# EAGLE board Battery Charging Circuit (EAGLE 9.6.2)
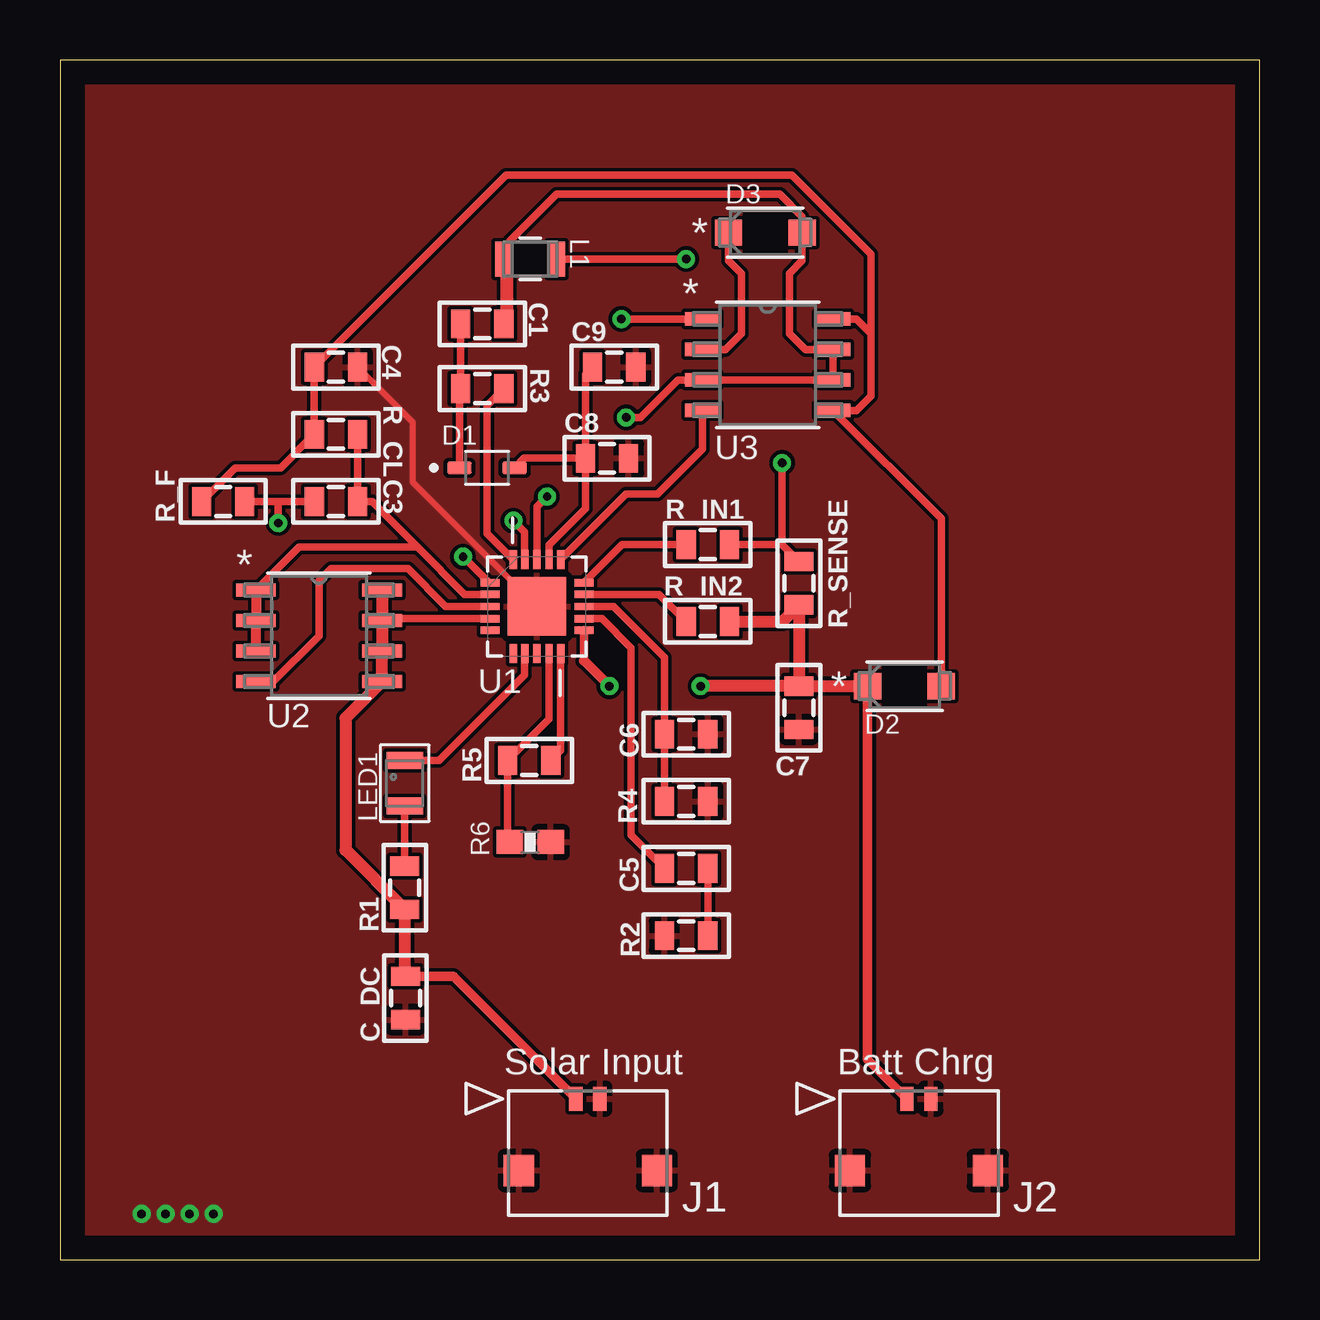
[diagram p0: board, top side]
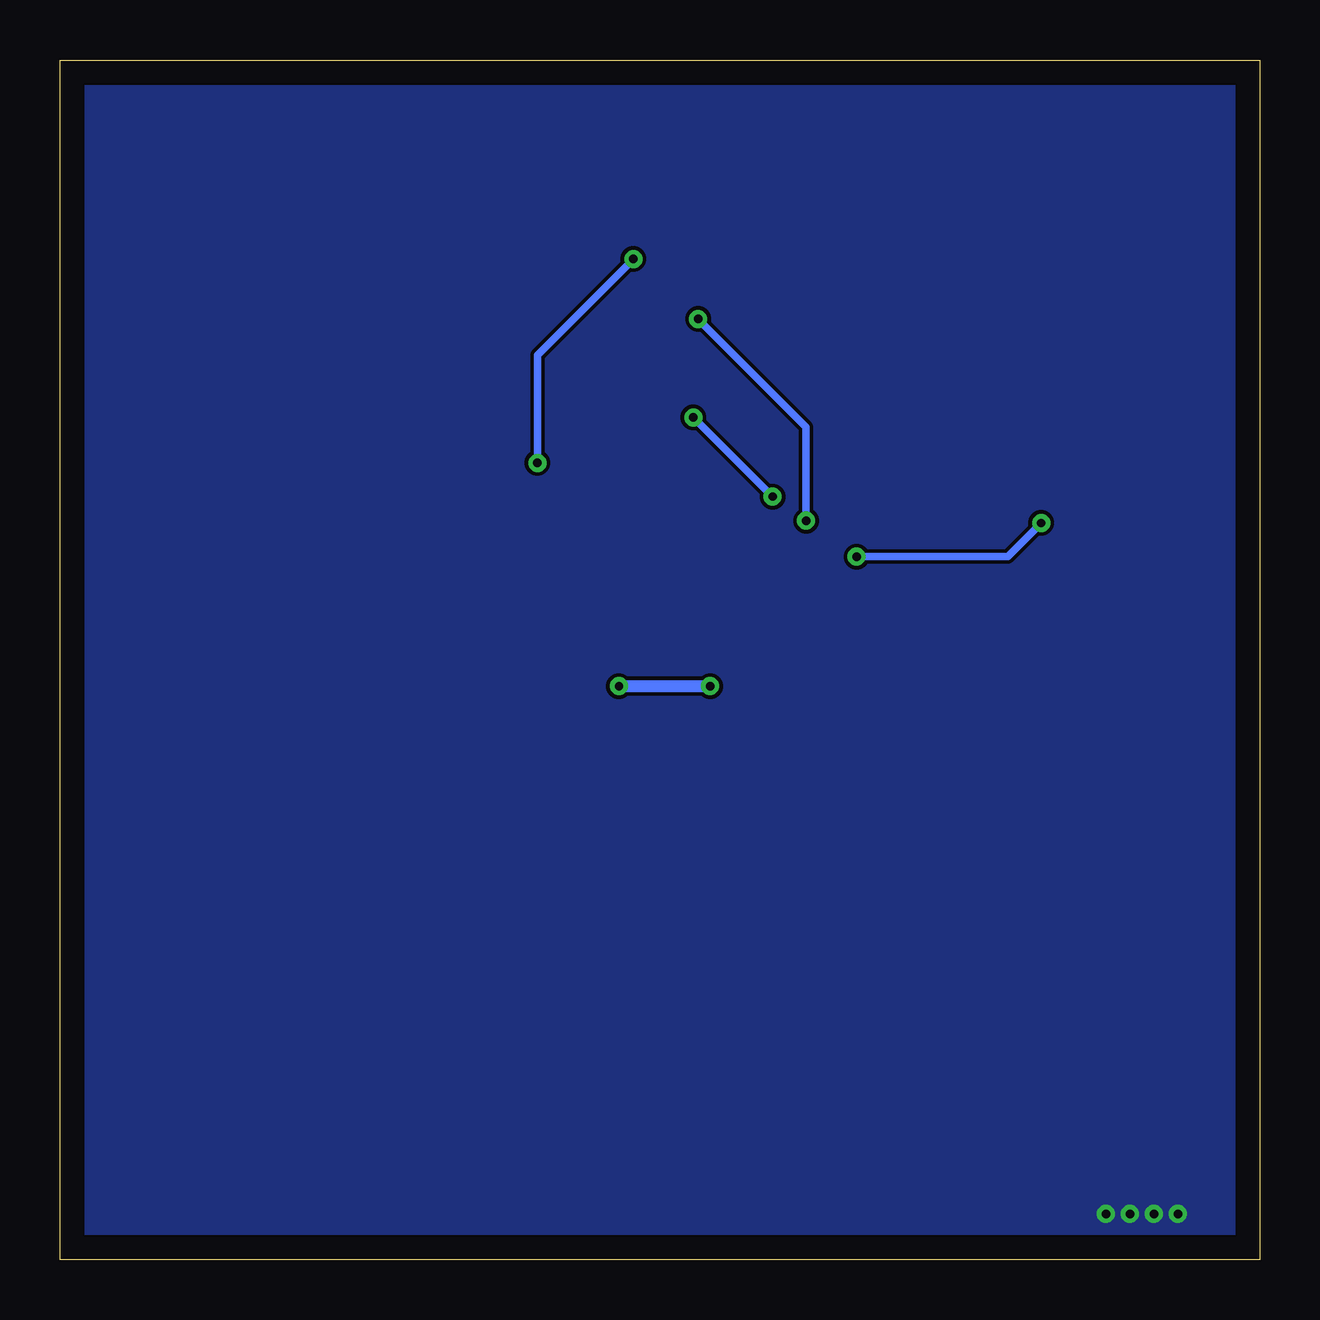
[diagram p1: board, bottom side, seen from below]

Size 50 x 50 mm. Coordinates in mm from the lower left corner, seen from the top.
Outline: 0,0 50,0 50,50 0,50 0,0
Copper layers (1*16): Top 0.035mm / dielectric 1.5mm / Bottom 0.035mm
Design rules "default": minimum track width 6mil, minimum drill 0.35mm, track to track 6mil, track to pad 6mil, pad to pad 6mil, via to via 6mil, smd to smd 6mil, copper to edge 40mil, drill to drill 6mil, minimum pad ring 10mil, minimum via ring 8mil, stop-mask expansion 4mil, vias tented up to drill 0mil, thermal gap 10mil

## Footprints (pad centres in the part's own frame; a part is rotated, then mirrored left to right if it is on the bottom)
0805 = smd 0.8 x 1.2: 1 -0.9,0; 2 0.9,0
SOD2512X110N = smd 1.03 x 0.52: A 1.15,0; C -1.15,0
CR_0LSFT1G_ONS = smd 1.143 x 1.092: 1 -1.537,0; 2 1.537,0
CON_5037630291 = smd 0.55 x 1: 1 0,0; 2 -1,0 | smd 1.26 x 1.3: 3 2.375,2.99; 4 -3.38,2.99
AIML-0805_ABR = smd 0.711 x 1.448: 1 -1.105,0; 2 1.105,0
LED_0805 = smd 0.711 x 1.524: 1 0,0; 2 1.905,0
0603-RES = smd 1.1 x 1: 1 -0.85,0; 2 0.85,0
QFN50P400X400X80-21N = smd 0.787 x 0.305: 1 -1.956,0.991; 2 -1.956,0.508; 3 -1.956,0; 4 -1.956,-0.508; 5 -1.956,-0.991; 11 1.956,-0.991; 12 1.956,-0.508; 13 1.956,0; 14 1.956,0.508; 15 1.956,0.991 | smd 0.305 x 0.787: 6 -0.991,-1.956; 7 -0.508,-1.956; 8 0,-1.956; 9 0.508,-1.956; 10 0.991,-1.956; 16 0.991,1.956; 17 0.508,1.956; 18 0,1.956; 19 -0.508,1.956; 20 -0.991,1.956 | smd 2.438 x 2.438: 21 0,0
SOIC-8_SI = smd 1.651 x 0.559: 1 -2.629,1.905; 2 -2.629,0.635; 3 -2.629,-0.635; 4 -2.629,-1.905; 5 2.629,-1.905; 6 2.629,-0.635; 7 2.629,0.635; 8 2.629,1.905
SOIC8_NARROW_VIS = smd 1.46 x 0.559: 1 -2.724,1.905; 2 -2.724,0.635; 3 -2.724,-0.635; 4 -2.724,-1.905; 5 2.724,-1.905; 6 2.724,-0.635; 7 2.724,0.635; 8 2.724,1.905

## Placement (x,y rotation side)
C1  0.1 uF  [0805]  17.6,39 0 top
C3  0.1 uF  [0805]  11.5,31.6 180 top
C4  10 uF  [0805]  11.5,37.2 0 top
C5  0.1 uF  [0805]  26.1,16.3 0 top
C6  4.7 uF  [0805]  26.1,21.9 0 top
C7  10 uF  [0805]  30.8,23 270 top
C8  1 uF  [0805]  22.8,33.4 0 top
C9  1 uF  [0805]  23.1,37.2 0 top
C_DC  0.1 uF  [0805]  14.4,10.9 270 top
D1  CMDSH-3TR  [SOD2512X110N]  17.8,33 0 top
D2  MBR230S1F  [CR_0LSFT1G_ONS]  35.2,23.9 0 top
D3  MBR230S1F  [CR_0LSFT1G_ONS]  29.4,42.8 0 top
J1  5037630291  [CON_5037630291]  21.5,6.7 180 top
J2  5037630291  [CON_5037630291]  35.3,6.7 180 top
L1  AIML-0805-150K-T  [AIML-0805_ABR]  19.6,41.7 180 top
LED1  LED_0805  [LED_0805]  14.37,18.9 90 top
R1  3 k  [0805]  14.37,15.5 270 top
R2  6.04 k  [0805]  26.1,13.5 0 top
R3  0  [0805]  17.6,36.3 180 top
R4  26.7 k  [0805]  26.1,19.1 180 top
R5  169 k  [0805]  19.56,20.8 180 top
R6  28.4k  [0603-RES]  19.6,17.4 180 top
R_CL  1  [0805]  11.5,34.4 180 top
R_F  5.1 k  [0805]  6.8,31.6 180 top
R_IN1  3.01 k  [0805]  27,29.8 0 top
R_IN2  3.01 k  [0805]  27,26.6 0 top
R_SENSE  1  [0805]  30.8,28.19 90 top
U1  LTC4012IUFPBF  [QFN50P400X400X80-21N]  19.88,27.22 0 top
U2  SI4431BDY-T1-E3  [SOIC-8_SI]  10.8,26 0 top
U3  AO4818B  [SOIC8_NARROW_VIS]  29.5,37.3 0 top

## Library data of the parts
C1 C3-C9 C_DC LED1 R1-R6 R_CL R_F R_IN1 R_IN2 R_SENSE = HSFL_Main_Library
D1 = charging; DESCRIPTION: Diode Schottky 30 V 100mA Surface Mount SOD-323; DIGI-KEY_PART_NUMBER: 1514-CMDSH-3TRPBFREECT-ND; MF: Central Semiconductor; MP: CMDSH-3 TR; PACKAGE: SOD-323 Central Semiconductor; PURCHASE-URL: https://pricing.snapeda.com/search/part/CMDSH-3 TR/?ref=eda
D2 D3 = charging; COPYRIGHT: Copyright (C) 2021 Ultra Librarian. All rights reserved.; DIGI-KEY_PART_NUMBER_1: MBR230LSFT1GOSTR-ND; DIGI-KEY_PART_NUMBER_2: MBR230LSFT1GOSCT-ND; DIGI-KEY_PART_NUMBER_3: MBR230LSFT1GOSDKR-ND; DIGI-KEY_PART_NUMBER_4: 2156-MBR230LSFT1G-OS-ND; MANUFACTURER_PART_NUMBER: MBR230LSFT1G; MFR_NAME: onsemi
J1 J2 = PDUv2; BUILT_BY: Molex_Team; COPYRIGHT: Copyright (C) 2018 Accelerated Designs. All rights reserved; MANUFACTURER_PART_NUMBER: 5037630291; SOURCELIBRARY: Add_to_database_2021-03-17; VENDOR: Molex Connector Corporation
L1 = charging; COPYRIGHT: Copyright (C) 2021 Ultra Librarian. All rights reserved.; DIGI-KEY_PART_NUMBER_1: 535-11623-1-ND; DIGI-KEY_PART_NUMBER_2: 535-11623-2-ND; DIGI-KEY_PART_NUMBER_3: 535-11623-6-ND; MANUFACTURER_PART_NUMBER: AIML-0805-150K-T; MFR_NAME: Abracon
U1 = charging; AVAILABILITY: In Stock; DESCRIPTION: Charger IC Multi-Chemistry 20-QFN (4x4); MF: Analog Devices; MP: LTC4012IUF#PBF; PACKAGE: QFN -20 Analog Devices; PRICE: None; PURCHASE-URL: https://pricing.snapeda.com/search/part/LTC4012IUF#PBF/?ref=eda
U2 = charging; COPYRIGHT: Copyright (C) 2021 Ultra Librarian. All rights reserved.; DIGI-KEY_PART_NUMBER_1: SI4431BDY-T1-E3CT-ND; DIGI-KEY_PART_NUMBER_2: SI4431BDY-T1-E3DKR-ND; DIGI-KEY_PART_NUMBER_3: SI4431BDY-T1-E3TR-ND; MANUFACTURER_PART_NUMBER: SI4431BDY-T1-E3; MFR_NAME: Vishay
U3 = charging; COPYRIGHT: Copyright (C) 2021 Ultra Librarian. All rights reserved.; DIGI-KEY_PART_NUMBER_1: SI4816BDY-T1-E3TR-ND; DIGI-KEY_PART_NUMBER_2: SI4816BDY-T1-E3CT-ND; DIGI-KEY_PART_NUMBER_3: SI4816BDY-T1-E3DKR-ND; MANUFACTURER_PART_NUMBER: SI4816BDY-T1-E3; MFR_NAME: Vishay

## Nets
BATT_CHRG: C7.1 D2.1 J2.1 R_IN2.2 R_SENSE.1 U1.11
BGATE: U1.16 U3.4
CHRG: LED1.2 U1.7
GND: C4.2 C6.2 C7.2 C8.2 C9.2 C_DC.2 J1.2 J1.3 J1.4 J2.2 J2.3 J2.4 R2.1 R4.1 R6.1 U1.21
ICL: U1.8
INFET: U1.3 U2.4
INH_SW1_NC: C_DC.1 J1.1 R1.2 U1.4 U2.5 U2.6 U2.7 U2.8
ITH: C5.1 U1.12
N$2: LED1.1 R1.1
N$6: C5.2 R2.2
N$7: R3.1 U1.20
N$8: C3.2 R_F.1 U1.1
N$9: C8.1 C9.1 D1.A U1.17
N$10: C1.1 D1.C R3.2
N$11: R_IN1.1 U1.15
N$12: R_IN2.1 U1.14
N$13: C6.1 R4.2 U1.13
N$15: R5.1 U1.10
N$16: R5.2 R6.2 U1.9
R_SENSE_R_IN1: L1.1 R_IN1.2 R_SENSE.2
S2: D3.1 U3.2
SHDN: U1.6
SW: C1.2 D3.2 L1.2 U1.18 U3.3 U3.6 U3.7
TGATE: U1.19 U3.1
U2_S: C3.1 R_CL.1 U1.2 U2.1 U2.2 U2.3
VBATT: C4.1 D2.2 R_CL.2 R_F.2 U3.5 U3.8

## Tracks (layer width: path | path; a pad name or v marks a point on that pad's centre or on a via)
BATT_CHRG  (via drill 0.35)
  Top 0.35: U1.11 21.84,24.96
  Top 0.4: D2.1 33.66,8.34 J2.1
  Top 0.406: 21.84,24.96 v22.9,23.9
  Top 0.508: R_IN2.2 30.11,26.6 R_SENSE.1 C7.1 | C7.1 D2.1 | C7.1 v26.7,23.9
  Bottom 0.508: v26.7,23.9 v22.9,23.9
BGATE
  Top 0.305: U1.16 23.59,31.9 24.9,31.9 26.78,33.78 U3.4
CHRG
  Top 0.305: U1.7 19.37,24.37 15.8,20.8 LED1.2
GND  (via drill 0.35)
  Top 0.254: U1.21 14.7,32.4 14.7,34.9 C4.2
  other vias: 3.4,1.9 4.4,1.9 5.4,1.9 6.4,1.9
  pour Top: -0.2,-0.2 -0.2,50.2 50.2,50.2 50.2,-0.2
  pour Bottom: -0.4,-0.4 -0.4,50.4 50.4,50.4 50.4,-0.4
INFET
  Top 0.305: U1.3 16.08,27.22 14.5,28.8 11.3,28.8 10.8,28.3 10.8,26 8.89,24.09 U2.4
INH_SW1_NC
  Top 0.305: U1.4 13.51,26.71 | 14.37,11.83 C_DC.1
  Top 0.4: C_DC.1 16.4,11.8 J1.1
  Top 0.508: U2.7 U2.6 U2.5 11.9,22.57 11.9,17.07 R1.2 14.37,11.83 | U2.8 U2.7 | 13.51,26.71 U2.7
ITH
  Top 0.305: U1.12 22.59,26.71 23.8,25.5 23.8,17.7 C5.1
N$2
  Top 0.305: LED1.1 R1.1
N$6
  Top 0.305: C5.2 R2.2
N$7
  Top 0.305: U1.20 17.8,30.27 17.8,35.6 R3.1
N$8  (via drill 0.35)
  Top 0.305: C3.2 9.1,31.6 | R_F.1 9.1,31.6 | 9.1,31.6 v9.1,30.7 | U1.1 17.89,28.21 v16.8,29.3
  Bottom 0.305: v9.1,30.7 10.5,29.3 v16.8,29.3
N$9
  Top 0.305: U1.17 20.39,29.79 21.9,31.3 C8.1 | D1.A 19.35,33.4 C8.1 | C8.1 21.9,36.9 C9.1
N$10
  Top 0.305: C1.1 R3.2 16.65,36.25 D1.C
N$11
  Top 0.305: U1.15 23.43,29.8 R_IN1.1
N$12
  Top 0.305: U1.14 24.97,27.73 R_IN2.1
N$13
  Top 0.305: R4.2 C6.1 25.2,25.1 23.08,27.22 U1.13
N$15
  Top 0.305: U1.10 20.87,21.21 R5.1
N$16
  Top 0.305: U1.9 20.39,22.53 R5.2 18.66,17.49 R6.2
R_SENSE_R_IN1  (via drill 0.35)
  Top 0.305: R_IN1.2 30.09,29.8 | 30.09,29.8 R_SENSE.2 | 30.09,29.8 30.1,29.81 v30.1,33.2 | L1.1 v26.1,41.7
  Bottom 0.305: v30.1,33.2 30.1,37.7 v26.1,41.7
S2
  Top 0.305: U3.2 27.73,37.94 28.4,38.6 28.4,41.1 27.86,41.64 D3.1
SW  (via drill 0.35)
  Top 0.305: 32.22,36.7 U3.7 31.07,37.94 30.4,38.6 30.4,41.1 30.94,41.64 D3.2 30.94,43.46 30,44.4 20.7,44.4 18.74,42.44 18.74,39.24 C1.2 L1.2 | 32.22,36.7 U3.6 | 32.22,36.7 32.19,36.66 U3.3 25.77,36.66 24.2,35.1 v23.6,35.1 | v20.3,31.8 19.88,31.38 U1.18
  Bottom 0.305: v20.3,31.8 v23.6,35.1
TGATE  (via drill 0.35)
  Top 0.305: U1.19 19.37,30.33 v18.9,30.8 | v23.4,39.2 U3.1
  Bottom 0.305: v18.9,30.8 18.9,34.7 v23.4,39.2
U2_S
  Top 0.305: U1.2 16.87,27.73 14.9,29.7 | 14.9,29.7 13,31.6 C3.1 R_CL.1 | U2.1 9.97,29.7 14.9,29.7
  Top 0.406: U2.1 U2.2 U2.3
VBATT
  Top 0.305: R_F.2 7.3,33 9.2,33 R_CL.2 C4.1 18.6,45.2 30.5,45.2 33.8,41.9 33.8,38.6 | U3.8 33.2,39.2 33.8,38.6 | 33.8,38.6 33.8,36 33.2,35.4 U3.5 36.74,30.88 D2.2

## Text on the board
tNames: Solar Input | Batt Chrg